# Altium PCB PCB_RB2_My — копия.PcbDoc (part 3 of 3)
Units mm, origin at the board's own origin, x right, y up, seen from the top; angles counter-clockwise.
Board outline 198 x 170 mm, 2 copper layers (Top, Bottom); 107 components, 89 nets, 429 pads, 3906 vias.
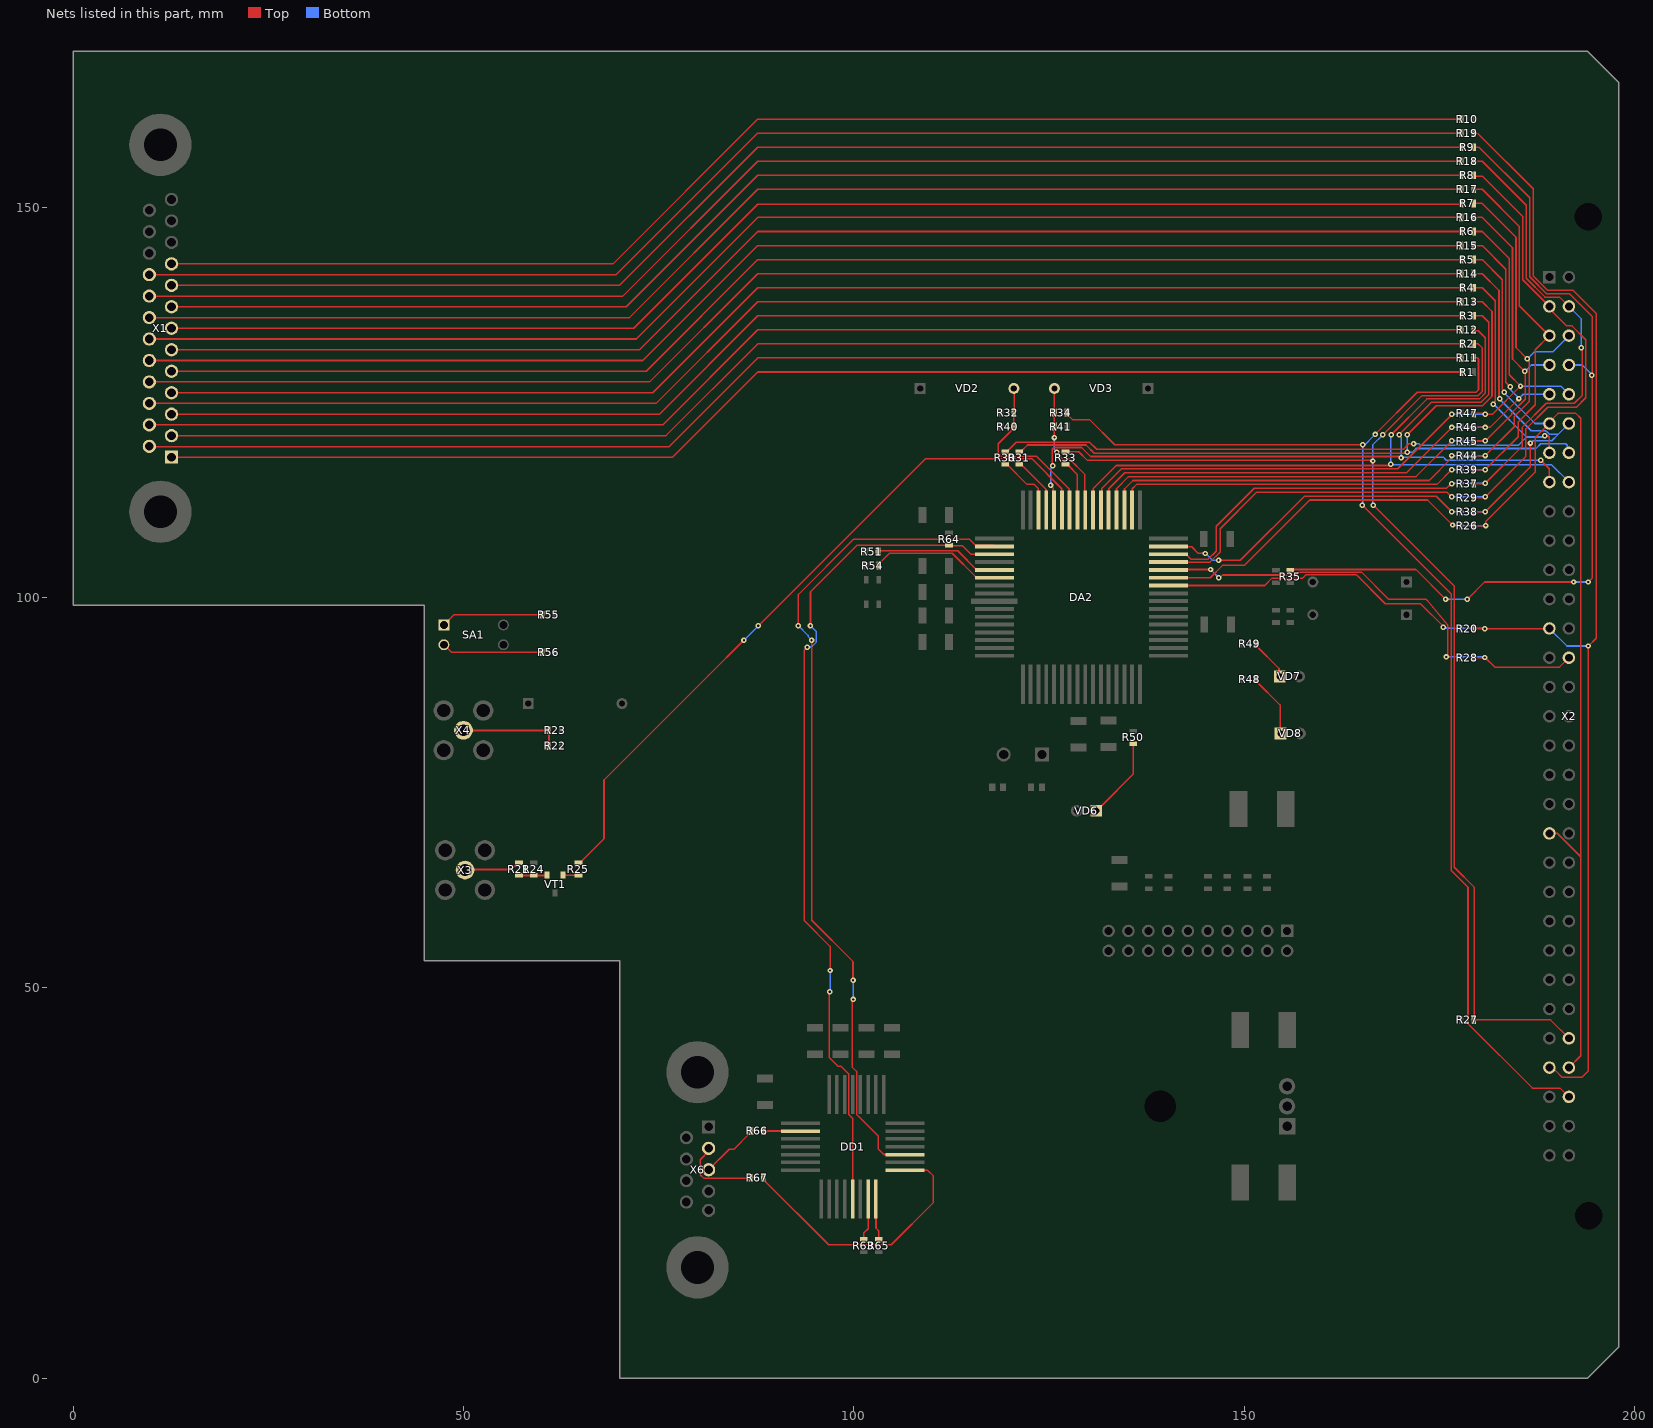
[diagram p3: the nets of this part, all layers, seen from the top]

## Via types
v1: diameter 0.7, hole 0.3, Top to Bottom, tented both sides, 3906 vias

## Nets (pads, with @x,y where several pads share a name; then routed paths per layer and width w, separated by ;. In a path a pad name is that pad's centre, name@x,y a point inside that pad or via, vN(x,y) a via of type N, cw(c..) or ccw(c..) an arc to the next point about the centre after c; other vN are vias at no path point) (continued)
NetDA2_48: DA2.48 R34.2 R41.1 VD3.2 | length 17.2
  Top w0.2: v1(125.7,120.5) R41.1@125.7,121.9 R34.2@125.7,123.7 125.7,126.25 VD3.2@125.725,126.275 ; v1(125.975,118.6) 125.975,118.465 126.665,117.775 127.59,117.775 129.6,115.765 DA2.48@129.6,111.2
  Bottom w0.2: v1(125.7,120.5) 125.7,118.967 125.975,118.692 v1(125.975,118.6)
NetDA2_49: DA2.49 R33.2 | length 6.6
  Top w0.2: R33.2@127.125,117.1 127.325,117.1 127.525,116.9 127.525,116.875 128.65,115.75 DA2.49@128.65,111.2
NetDA2_50: DA2.50 R32.2 R40.1 VD2.2 | length 22
  Top w0.2: R40.1@120.45,122.25 120.5,122.3 R32.2@120.5,123.7 ; R40.1@120.5,121.9 120.5,121.7 120.3,121.5 118.5,119.7 118.5,118.482 118.882,118.1 123.4,118.1 127.617,113.883 127.617,111.283 DA2.50@127.65,111.25 ; R32.2@120.525,123.7 120.525,126.2 VD2.2@120.575,126.25
NetDA2_51: DA2.51 R25.1 | length 92.1
  Top w0.2: R25.1@64.725,66.025 64.925,66.025 68,69.1 68,76.65 81.375,90.025 85.898,94.548 v1(85.925,94.548) ; v1(87.775,96.375) 109.175,117.775 122.825,117.775 126.65,113.95 DA2.51@126.65,111.2
  Bottom w0.2: v1(85.925,94.548) 85.948,94.548 v1(87.775,96.375)
NetDA2_53: DA2.53 R31.2 | length 7.4
  Top w0.2: R31.2@121.2,117.1 121.4,117.1 124.617,113.883 124.617,111.233 DA2.53@124.65,111.2
NetDA2_54: DA2.54 R30.2 | length 8.3
  Top w0.2: R30.2@119.4,117.1 119.6,117.1 122.2,114.5 123.1,114.5 123.65,113.95 DA2.54@123.65,111.2
NetDA2_58: DA2.58 DD1.20 | length 107.5
  Top w0.2: v1(92.9,96.4) 92.9,100.4 100,107.5 114.775,107.5 115.575,106.7 117.85,106.7 DA2.58@118,106.55 ; v1(94.588,94.548) 94.6,94.537 94.6,58.675 99.9,53.375 v1(99.9,50.975) ; v1(99.925,48.525) 99.829,48.429 99.829,48.212 99.775,48.158 99.775,39.875 100.35,39.3 100.35,33.797 100.522,33.625 103.15,30.997 103.15,29.35 103.84,28.66 DD1.20@106.53,28.66
  Bottom w0.2: v1(92.9,96.4) 94.14,95.16 94.14,95.019 94.588,94.57 v1(94.588,94.548) ; v1(99.9,50.975) 99.925,50.95 v1(99.925,48.525)
NetDA2_59: DA2.59 DD1.14 R64.1 | length 108.3
  Top w0.2: v1(94.025,93.625) 93.65,93.25 93.65,58.625 96.957,55.318 v1(96.957,52.232) ; v1(94.45,96.4) 94.45,100.75 100.4,106.7 112.7,106.7 ; v1(96.9,49.532) 96.85,49.482 96.85,41.1 97.987,39.963 98.362,39.963 99.325,39 99.325,33.822 99.84,33.307 DD1.14@99.84,22.97 ; 112.7,106.625 113.95,106.625 115.025,105.55 DA2.59@117.95,105.55
  Bottom w0.2: v1(94.025,93.625) 94.071,93.671 94.571,93.671 95.163,94.263 95.163,95.687 v1(94.45,96.4) ; v1(96.9,49.532) 96.975,49.607 96.975,52.215 v1(96.957,52.232)
NetDA2_61: DA2.61 R51.2 | length 15.8
  Top w0.2: R51.2@103.2,106 113.3,106 115.75,103.55 DA2.61@117.95,103.55
NetDA2_62: DA2.62 R54.1 | length 14.9
  Top w0.2: R54.1@103.2,104.3 103.4,104.5 104.575,105.675 112.6,105.675 115.575,102.7 116.125,102.7 DA2.62@116.275,102.55
NetDD1_5: DD1.5 R66.1 | length 4.7
  Top w0.2: R66.1@88.425,31.675 93.135,31.675 DD1.5@93.15,31.66
NetDD1_16: DD1.16 R63.2 | length 5.4
  Top w0.2: R63.2@101.275,17.8 101.275,18.6 101.84,19.165 DD1.16@101.84,22.97
NetDD1_17: DD1.17 R65.2 | length 5.3
  Top w0.2: DD1.17@102.84,22.97 102.84,19.24 103.2,18.88 R65.2@103.2,17.8
NetDD1_18: DD1.18 R67.1 | length 35.3
  Top w0.2: R67.1@88.525,25.8 R67.1@88.4,25.675 88.4,25.475 96.775,17.1 104.8,17.1 110.2,22.5 110.2,25.9 109.44,26.66 DD1.18@106.53,26.66
NetR1_1: R1.1 X1.1 | length 169.7
  Top w0.2: X1.1@12.6,118 76.8,118 87.7,128.9 R1.1@177.8,128.9
NetR2_1: R2.1 X1.2 | length 170.1
  Top w0.2: X1.2@12.6,120.75 75.95,120.75 87.7,132.5 R2.1@177.8,132.5
NetR3_1: R3.1 X1.3 | length 170.4
  Top w0.2: X1.3@12.6,123.5 75.1,123.5 87.7,136.1 R3.1@177.8,136.1
NetR4_1: R4.1 X1.4 | length 170.8
  Top w0.2: X1.4@12.6,126.25 74.25,126.25 87.7,139.7 R4.1@177.8,139.7
NetR5_1: R5.1 X1.5 | length 171.1
  Top w0.2: X1.5@12.6,129 73.4,129 87.7,143.3 R5.1@177.8,143.3
NetR6_1: R6.1 X1.6 | length 171.5
  Top w0.2: X1.6@12.6,131.75 72.55,131.75 87.7,146.9 R6.1@177.8,146.9
NetR7_1: R7.1 X1.7 | length 171.8
  Top w0.2: X1.7@12.6,134.5 71.8,134.5 87.7,150.4 177.7,150.4 R7.1@177.8,150.5
NetR8_1: R8.1 X1.8 | length 172.2
  Top w0.2: X1.8@12.6,137.25 70.85,137.25 87.7,154.1 R8.1@177.8,154.1
NetR9_1: R9.1 X1.9 | length 172.5
  Top w0.2: X1.9@12.6,140 70,140 87.7,157.7 R9.1@177.8,157.7
NetR10_1: R10.1 X1.10 | length 172.9
  Top w0.2: X1.10@12.6,142.75 69.15,142.75 87.7,161.3 R10.1@177.8,161.3
NetR11_1: R11.1 X1.14 | length 172.8
  Top w0.2: X1.14@9.76,119.375 9.835,119.3 76.3,119.3 87.7,130.7 R11.1@177.8,130.7
NetR12_1: R12.1 X1.15 | length 173.1
  Top w0.2: X1.15@9.76,122.125 75.525,122.125 87.7,134.3 R12.1@177.8,134.3
NetR13_1: R13.1 X1.16 | length 173.4
  Top w0.2: X1.16@9.76,124.875 74.675,124.875 87.7,137.9 R13.1@177.8,137.9
NetR14_1: R14.1 X1.17 | length 173.8
  Top w0.2: X1.17@9.76,127.625 73.825,127.625 87.7,141.5 R14.1@177.8,141.5
NetR15_1: R15.1 X1.18 | length 174.1
  Top w0.2: X1.18@9.76,130.375 72.975,130.375 87.7,145.1 R15.1@177.8,145.1
NetR16_1: R16.1 X1.19 | length 174.5
  Top w0.2: X1.19@9.76,133.125 72.125,133.125 87.7,148.7 R16.1@177.8,148.7
NetR17_1: R17.1 X1.20 | length 174.8
  Top w0.2: X1.20@9.76,135.875 71.275,135.875 87.7,152.3 R17.1@177.8,152.3
NetR18_1: R18.1 X1.21 | length 175.2
  Top w0.2: X1.21@9.76,138.625 70.425,138.625 87.7,155.9 R18.1@177.8,155.9
NetR19_1: R19.1 X1.22 | length 175.5
  Top w0.2: X1.22@9.76,141.375 69.575,141.375 87.7,159.5 R19.1@177.8,159.5
NetR21_1: R21.1 X3.1 | length 7.3
  Top w0.2: X3.1@50.2,65.1 50.275,65.175 56.1,65.175 56.7,65.775 56.7,65.825 56.9,66.025 R21.1@57.1,66.025
NetR21_2: R21.2 R24.2 VT1.3 | length 3.6
  Top w0.254: R21.2@57.1,64.425 58.525,64.425 60.7,64.425 VT1.3@60.725,64.45
NetR22_2: R22.2 R23.1 X4.1 | length 13.4
  Top w0.254: X4.1@50,83 R23.1@60.925,83 ; R22.2@60.925,80.8 R22.2@60.925,81 R23.1@60.925,83 ; R23.1@60.925,83.2 R23.1@60.925,83 ; R23.1@60.95,83 R23.1@60.925,83
NetR25_2: R25.2 VT1.2 | length 2
  Top w0.2: VT1.2@62.725,64.45 64.7,64.45 R25.2@64.725,64.425
NetR48_2: R48.2 VD8.1 | length 8.5
  Top w0.2: R48.2@151.5,89.55 151.5,89.35 154.6,86.25 VD8.1@154.6,82.3
NetR49_2: R49.2 VD7.1 | length 5.6
  Top w0.2: R49.2@151.5,94.1 151.5,93.9 154.467,90.933 VD7.1@154.467,89.7
NetR50_2: R50.2 VD6.1 | length 10.9
  Top w0.2: VD6.1@130.719,72.7 131.369,73.35 131.75,73.35 135.8,77.4 R50.2@135.8,81.3
NetR55_1: R55.1 SA1.1 | length 13.1
  Top w0.2: SA1.1@47.5,96.5 48.8,97.8 R55.1@60.1,97.8
NetR56_1: R56.1 SA1.3 | length 13
  Top w0.2: SA1.3@47.5,93.96 48.46,93 R56.1@60.1,93
NetR66_2: R66.2 X6.3 | length 7.9
  Top w0.2: X6.3@81.3,26.45 X6.3@81.475,26.625 ; X6.3@81.4,26.7 84.05,29.35 84.65,29.35 86.575,31.275 86.625,31.275 86.825,31.475 R66.2@86.825,31.675
NetR67_2: R67.2 X6.2 | length 10.5
  Top w0.2: X6.2@81.4,29.45 81.4,29.075 80.325,28 80.325,26.075 80.8,25.6 86.725,25.6 R67.2@86.8,25.675
"Внеш. зап. 15В": R11.2 R34.1 X2.29B | length 158.8
  Top w0.2: R34.1@127.3,123.7 127.3,123.5 127.5,123.3 128,122.8 130.2,122.8 133.425,119.575 v1(165.2,119.575) ; v1(165.15,111.825) 176.525,100.45 176.525,65.05 178.675,62.9 178.675,45.425 186.925,37.175 190.475,37.175 X2.29B@191.6,36.05 ; v1(166.775,120.9) 172.175,126.3 179.7,126.3 180.025,126.625 180.025,130.575 179.9,130.7 R11.2@179.4,130.7
  Bottom w0.2: v1(165.15,111.825) 165.2,111.875 v1@165.2,119.4 ; v1(165.2,119.575) v1@165.2,119.4 ; v1(166.775,120.9) 165.275,119.4 v1@165.2,119.4
"Внеш. зап. лог. 1": DA2.34 R19.2 R20.1 X2.13A X2.28A | length 194.9
  Top w0.2: DA2.34@140.3,101.55 152.632,101.55 153.582,102.5 157.5,102.5 157.95,102.95 164.35,102.95 168.074,99.226 172.599,99.226 175.525,96.3 v1(175.525,96.2) ; R20.1@179.3,96 R20.1@179.4,96 189.05,96 X2.13A@189.1,96.05 ; R19.2@179.4,159.5 179.5,159.4 180,159.4 187.025,152.375 187.025,141.207 188.832,139.4 192.1,139.4 195.1,136.4 195.1,94.8 v1(194.1,93.8) 194.1,39.4 193.275,38.575 190.725,38.575 189.878,39.422 189.857,39.422 189.479,39.8 X2.28A@189.1,39.8 ; v1(180.843,96.028) v1@180.845,96.031
  Bottom w0.2: v1(175.525,96.2) 175.621,96.104 176.263,96.104 176.267,96.1 180.772,96.1 v1(180.843,96.028) ; X2.13A@189.05,96 X2.13A@189.1,96.05 191.35,93.8 v1(194.1,93.8)
"Имп. 0": DA2.37 R8.2 R29.1 X2.2A | length 103.4
  Top w0.2: DA2.37@140.3,104.55 145.625,104.55 146.925,105.85 146.925,108.825 151.6,113.5 176,113.5 v1(176.6,112.9) ; R29.1@179.4,112.8 180.615,112.8 180.619,112.804 180.804,112.804 v1(180.9,112.9) 186.1,118.1 186.1,121.6 188.9,124.4 192.56,124.4 193.775,125.615 193.775,133.025 192,134.8 191.325,134.8 189.1,137.025 X2.2A@189.1,137.3 188.825,137.575 185.675,140.725 185.675,148.825 180.5,154 R8.2@179.4,154
  Bottom w0.2: v1(176.6,112.9) v1(180.9,112.9)
"Имп. 1": DA2.38 R18.2 R37.1 X2.2B | length 104.3
  Top w0.2: DA2.38@140.3,105.55 142.55,105.55 143.2,104.9 145.375,104.9 146.425,105.95 146.425,109.125 151.3,114 175.931,114 176.402,114.471 v1@176.529,114.471 ; R18.2@179.3,155.9 180.5,155.9 186.125,150.275 186.125,140.9 188.525,138.5 190.4,138.5 X2.2B@191.6,137.3 ; R37.1@179.4,114.6 180.85,114.6 v1(180.9,114.65) 185.6,119.35 185.6,121.8 188.7,124.9 192.3,124.9 193.3,125.9 193.3,131.633 193.296,131.637 193.296,131.904 v1(193.2,132)
  Bottom w0.2: v1(176.6,114.6) 176.65,114.65 v1(180.9,114.65) ; X2.2B@191.6,137.3 193.2,135.7 v1(193.2,132)
"Имп. 1 ПРД 1к": R4.2 R30.1 X2.7A | length 96.3
  Top w0.2: R30.1@119.4,118.7 119.6,118.7 120.8,119.9 130.2,119.9 131.041,119.059 131.1,119 170.4,119 171.1,119.7 v1(171.7,119.7) ; R4.2@179.4,139.7 180.5,139.7 182.175,138.025 182.175,125.16 181.925,124.91 v1(181.925,124.775) ; v1(188.507,120.73) 188.533,120.704 188.942,120.704 189.1,120.546 X2.7A@189.1,118.55
  Bottom w0.2: v1(171.7,119.7) 171.71,119.69 172.41,119.69 172.6,119.5 185.1,119.5 186.175,120.575 ; v1(181.925,124.775) 181.975,124.775 186.175,120.575 ; v1(188.507,120.73) 188.372,120.73 188.217,120.575 186.175,120.575
"Имп. 1 ПРД 2к": R13.2 R31.1 X2.7B | length 101.7
  Top w0.2: R31.1@121.2,118.7 121.4,118.7 122.25,119.55 129.75,119.55 130.8,118.5 163.491,118.5 170.533,118.5 170.537,118.504 170.804,118.504 v1(170.9,118.6) ; v1(170.9,120.875) 174.6,124.575 180.535,124.575 181.75,125.79 181.75,136.65 180.5,137.9 R13.2@179.4,137.9 ; X2.7B@191.6,118.3 X2.7B@191.6,118.55
  Bottom w0.2: v1(170.9,120.875) v1(170.9,118.6) 171.5,118.6 172,119.1 187.383,119.1 187.983,119.7 191.2,119.7 191.397,119.503 191.397,118.753 X2.7B@191.6,118.55
"Имп. 2": DA2.42 R17.2 R39.1 X2.3A | length 94.5
  Top w0.2: DA2.42@135.65,111.2 135.675,111.225 135.675,113.95 136.225,114.5 174.7,114.5 v1(176.6,116.4) ; R17.2@179.3,152.3 180.5,152.3 185.25,147.55 185.25,137.4 X2.3A@189.1,133.55 ; R39.1@179.4,116.4 v1(180.9,116.4) 185.1,120.6 185.1,122.5 187.3,124.7 187.3,131.75 X2.3A@189.05,133.5
  Bottom w0.2: v1(176.6,116.4) v1(180.9,116.4)
"Имп. 3": DA2.43 R7.2 R44.1 X2.3B | length 97.2
  Top w0.2: DA2.43@134.65,111.2 134.675,111.225 134.675,113.925 135.75,115 173.7,115 176.504,117.804 176.504,118.104 v1(176.6,118.2) ; R7.2@179.3,150.5 180.5,150.5 184.825,146.175 184.825,132.025 v1(186.25,130.6) ; R44.1@179.4,118.2 v1(180.9,118.2) 184.6,121.9 184.6,123.2 186.5,125.1 v1@186.5,130.7
  Bottom w0.2: v1(176.6,118.2) v1@180.8,118.2 ; v1(186.25,130.6) 186.3,130.6 187.2,131.5 189.55,131.5 191.568,133.518 X2.3B@191.6,133.55
"Имп. 3МГц": DA2.35 R5.2 R26.1 X2.6A X2.20A X2.28B | length 185
  Top w0.2: DA2.35@140.3,102.55 145.65,102.55 147.225,104.125 150.025,104.125 158.4,112.5 173.5,112.5 v1(176.7,109.3) ; R5.2@179.3,143.3 180.5,143.3 183.075,140.725 183.075,126.685 183.325,126.435 v1(183.325,126.3) ; R26.1@179.4,109.2 v1@181,109.2 ; v1(180.943,109.228) 180.945,109.231 180.945,109.745 187.3,116.1 187.3,120.5 X2.6A@189.1,122.3 189.1,122.5 190.2,123.6 192.5,123.6 193.125,122.975 193.125,66.8 ; X2.20A@189.1,69.8 190.125,69.8 193.125,66.8 ; X2.28B@191.6,39.8 193.125,41.325 193.125,66.8
  Bottom w0.2: v1(176.7,109.3) 176.772,109.228 v1(180.943,109.228) ; v1(183.325,126.3) 183.325,126.225 187.25,122.3 X2.6A@189.1,122.3
"Имп. 3МГц инв.": DA2.36 R28.1 X2.14B | length 62.2
  Top w0.2: DA2.36@140.3,103.55 142.8,103.55 142.85,103.6 v1(145.7,103.6) ; v1(146.745,102.543) 146.88,102.543 147.237,102.9 156.618,102.9 156.993,103.275 165.026,103.275 168.5,99.801 173.299,99.801 173.416,99.684 176.054,96.524 176.1,96.468 176.1,92.76 175.875,92.535 v1(175.875,92.4) ; R28.1@179.3,92.3 R28.1@179.4,92.3 ; R28.1@179.4,92.1 R28.1@179.4,92.3 ; v1(180.843,92.328) v1@180.845,92.331 ; X2.14B@191.6,92.3 190.4,91.1 182.1,91.1 180.9,92.3 R28.1@179.4,92.3
  Bottom w0.2: v1(145.7,103.6) 146.745,102.555 v1(146.745,102.543) ; v1(175.875,92.4) 180.772,92.4 v1(180.843,92.328)
"Имп. 4": DA2.44 R16.2 R45.1 X2.4A | length 91.8
  Top w0.2: DA2.44@133.65,111.2 133.65,113.95 135.2,115.5 172.025,115.5 v1(176.6,120.075) ; R16.2@179.3,148.7 R16.2@179.4,148.7 180.5,148.7 184.375,144.825 184.375,130.55 v1(185.925,129) ; R45.1@179.4,120 179.475,120.075 v1(180.9,120.075) 184.3,123.475 184.3,123.7 186,125.4 v1@186,129
  Bottom w0.2: v1(176.6,120.075) v1(180.9,120.075) ; v1(185.925,129) 186,129 186.8,129.8 X2.4A@189.1,129.8
"Имп. 5": DA2.45 R15.2 R46.1 X2.5A | length 88.5
  Top w0.2: DA2.45@132.65,111.2 132.65,113.95 134.7,116 170.8,116 v1(176.6,121.8) ; R15.2@179.3,145.1 180.5,145.1 183.525,142.075 183.525,127.575 v1(184.1,127) ; R46.1@179.4,121.8 v1(180.9,121.8) 181.5,121.8 v1(185.2,125.5)
  Bottom w0.2: v1(176.6,121.8) v1(180.9,121.8) ; v1(184.1,127) 184.185,126.915 184.185,126.565 185.2,125.55 v1(185.2,125.5) 185.75,126.05 X2.5A@189.1,126.05
"Имп. 6": DA2.46 R6.2 R47.1 X2.5B | length 93.2
  Top w0.2: DA2.46@131.65,111.2 131.762,111.312 131.762,113.962 134.3,116.5 169.69,116.5 176.6,123.41 v1(176.6,123.5) ; R6.2@179.3,146.9 180.5,146.9 183.95,143.45 183.95,128.55 v1(185.4,127.1) 181.8,123.5 v1(180.9,123.5) 180.765,123.5 180.665,123.6 R47.1@179.4,123.6
  Bottom w0.2: v1(176.6,123.5) 176.632,123.468 180.868,123.468 v1(180.9,123.5) ; v1(185.4,127.1) 190.55,127.1 X2.5B@191.6,126.05
"Имп. ПЗ АПД": DA2.39 R14.2 R38.1 X2.6B | length 91.7
  Top w0.2: DA2.39@140.3,106.55 140.35,106.5 143.3,106.5 144.103,105.697 144.953,105.697 v1(145,105.65) ; v1(146.725,104.775) 149.5,104.775 157.725,113 174.6,113 v1(176.6,111) ; R38.1@179.4,111 v1(180.9,111) 186.675,116.775 v1(186.675,119.8) ; R14.2@179.4,141.5 180.5,141.5 182.65,139.35 182.65,125.842 182.654,125.838 182.654,125.571 v1(182.75,125.475)
  Bottom w0.2: v1(145,105.65) 145.075,105.65 145.95,104.775 v1(146.725,104.775) ; v1(176.6,111) v1(180.9,111) ; v1(182.75,125.475) 182.75,125.4 186.787,121.363 188.602,121.363 188.69,121.275 188.775,121.275 189.15,120.9 190.2,120.9 ; v1(186.675,119.8) 186.742,119.8 187.042,120.1 189.4,120.1 190.2,120.9 ; X2.6B@191.6,122.3 190.2,120.9
Лог.1: R2.2 R27.1 R33.1 X2.27B | length 155.7
  Top w0.2: R33.1@127.125,118.7 128.8,118.7 129.925,117.575 166.425,117.575 v1(166.5,117.5) ; v1(166.525,111.85) 176.9,101.475 176.9,65.475 179.5,62.875 R27.1@179.5,46 ; v1(167.775,120.875) 167.788,120.875 172.788,125.875 179.975,125.875 180.475,126.375 180.475,132.025 180,132.5 R2.2@179.4,132.5 ; R27.1@179.4,45.9 189.25,45.9 X2.27B@191.6,43.55
  Bottom w0.2: v1(166.525,111.85) 166.5,111.875 v1(166.5,117.5) 166.5,119.6 v1(167.775,120.875)
"Призн. 1мкс": DA2.52 R3.2 X2.8A | length 103.3
  Top w0.2: v1(125.2,114.4) 125.205,114.4 125.572,114.033 125.572,111.278 DA2.52@125.65,111.2 ; v1(125.5,116.9) 125.411,116.989 125.411,118.056 125.4,118.067 125.4,119 125.625,119.225 129.175,119.225 130.325,118.075 169.815,118.075 169.965,117.925 v1(170.1,117.925) ; v1(169.85,120.875) 173.975,125 180.3,125 181.325,126.025 181.325,135.275 180.5,136.1 R3.2@179.4,136.1 ; v1(188,117.6) 189.1,116.5 X2.8A@189.1,114.8 X2.8A@188.9,114.6
  Bottom w0.2: v1(125.2,114.4) 125.2,116.533 125.5,116.833 v1(125.5,116.9) ; v1(169.85,120.875) 169.85,120.758 170.1,120.508 v1(170.1,117.925) 170.175,118 175.5,118 175.9,117.6 v1(188,117.6)
"Призн. 2мкс": DA2.47 R12.2 X2.8B | length 93
  Top w0.2: DA2.47@130.65,111.2 130.65,113.95 133.625,116.925 168.49,116.925 168.665,117.1 v1(168.8,117.1) ; v1(168.85,120.875) 173.425,125.45 180.15,125.45 180.9,126.2 180.9,133.3 180,134.2 179.5,134.2 R12.2@179.4,134.3
  Bottom w0.2: v1(168.85,120.875) 168.8,120.825 v1(168.8,117.1) 168.875,117.025 189.375,117.025 X2.8B@191.6,114.8
Режим: R9.2 R35.1 X2.4B | length 108.7
  Top w0.2: R35.1@155.9,103.5 156,103.6 172,103.6 v1(175.8,99.8) ; v1(178.6,99.8) 180.8,102 v1(192.2,102) ; R9.2@179.3,157.7 180.1,157.7 186.575,151.225 186.575,141.1 188.775,138.9 191.7,138.9 194.6,136 v1@194.6,128.5 ; v1(194.1,102) 194.6,102.5 194.6,128.425 v1(194.525,128.5)
  Bottom w0.2: v1(175.8,99.8) v1(178.6,99.8) ; X2.4B@191.6,129.8 193.3,129.8 194.525,128.575 v1(194.525,128.5) ; v1(192.2,102) v1(194.1,102)
pads on no net: DA1.4 DA2.1 DA2.2 DA2.6 DA2.7 DA2.8 DA2.9 DA2.13 DA2.17 DA2.18 DA2.32 DA2.55 DA2.60 DD1.6 DD1.7 DD1.8 DD1.9 DD1.10 DD1.11 DD1.12 DD1.13 DD1.19 DD1.21 DD1.22 DD1.23 DD1.24 DD1.29 DD1.30 X1.11 X1.12 X1.13 X1.25 X1.26 X1.27 X2.1 X2.1A X2.2 X2.9A X2.9B X2.10A X2.10B X2.11A X2.11B X2.12A X2.12B X2.13B X2.14A X2.15A X2.15B X2.16A X2.16B X2.17A X2.17B X2.18A X2.18B X2.19A X2.19B X2.20B X2.21A X2.21B X2.22A X2.22B X2.23A X2.23B X2.25A X2.25B X2.26A X2.26B X2.27A X2.29A X2.31A X3.3 X3.4 X3.5 X4.3 X4.4 X4.5 X5.11 X5.17 X5.19 X6.1 X6.4 X6.6 X6.7 X6.8 X6.9 X6.10 X6.11

## Polygon pours and split planes (outlines as drawn)
GND on Bottom "Bottom Layer-GND" (solid, remove dead copper, pour order 2): 0,0 0,170 198,170 198,0
GND on Top "Top Layer-GND" (solid, remove dead copper, pour order 0): 0,170 198,170 198,-1 1,-1 0,0

## Other copper
Top:
  pour cut-out: 178.9,162 178.9,128.2 187.5,128.2 187.6,128.3 187.194,128.706 187.194,153.673
  pour cut-out: 136.5,83.1 136.5,82.4 136.8,82.4 136.8,83.1
  pour cut-out: 150.142,103.842 150.145,103.84 150.145,103.1 146.8,103.1 146.3,103.6 146.5,103.8
  pour cut-out: 177.26,161.606 87.7,161.606 87.7,128.842 87.942,128.6 177.5,128.6
  pour cut-out: 135.642,66.658 136.758,66.658 136.8,66.7 137.951,65.549 137.951,64.825 137.508,64.825 137.404,64.928
  pour cut-out: 177.188,68.011 177.206,67.993 178.021,67.993 192.5,52.9 191.288,53.012 177.325,66.975 177.206,66.975
  pour cut-out: 120.1,128.6 126.7,128.6 126.717,128.583 126.717,128.183 120.083,128.183
  pour cut-out: 85.794,95.151 93.994,99.959 101.425,110.076
  pour cut-out: 111.5,96.475 112.75,96.475 112.75,95.95 112.325,95.525 111.5,95.525
  pour cut-out: 109.5,102.025 109.5,99.506 110.4,99.625 115.275,100.825 115.275,101.3 113.104,103.471
  pour cut-out: 108.625,105.375 109.525,105.375 111.425,105.4 111.5,105.4 111.5,103.292 110.808,102.6 108.05,102.6
  pour cut-out: 112.9,99.475 111.5,99.475 111.5,98.925 112.9,98.925
  pour cut-out: 137.3,107.125 137.625,107.125 137.825,106.925 137.825,97.05 137.2,97.05
  pour cut-out: 101.43,25.67 102.6,25.67 102.6,20.275 101.405,20.275
  pour cut-out: 95.438,25.687 95.455,25.67 100.25,25.67 100.25,20.275 95.412,20.275
  pour cut-out: 95.85,26.235 90.45,26.235 90.45,33.085 95.846,33.085 95.863,33.102
  pour cut-out: 102.041,33.098 109.225,32.9 109.23,32.895 109.23,26.986 103.929,26.986 103.83,27.085 103.83,28.506
  pour cut-out: 104.265,39.05 104.265,34.25 104.418,34.25 104.5,38.407 104.5,39.05
  pour cut-out: 103.265,39.05 103.265,33.809 103.409,33.809 103.425,34.625 103.425,35.475 103.425,39.05
  pour cut-out: 102.6,105.2 103.488,105.2 103.525,105.125 103.54,105.073 103.267,104.8 102.7,104.8
  pour cut-out: 121.2,108.5 121.175,108.475 121.175,108 137.1,108 137.1,108.5
  pour cut-out: 56.056,96.248 55.472,94.868 58.7,95.675 59.38,96.355
  pour cut-out: 122.025,113.9 122.025,114.525 122.925,114.525 123.55,113.9
  pour cut-out: 121.2,91.6 121.2,91.942 121.205,91.947 126.04,91.947 126.04,91.653 125.988,91.6
  pour cut-out: 123.5,86.2 124.4,86.2 124.5,86.1 124.5,83.7 123.4,83.7
  pour cut-out: 176.953,65.825 177.2,66 177.5,66 180.4,63.1 180.2,63 179.8,62.9 177.547,65.153
  pour cut-out: 133.1,86.702 133.1,85.011 133.354,84.757 134.458,84.757
  pour cut-out: 173.416,100.084 174.416,101.084 176.3,99.2 176.3,96.712
  pour cut-out: 120,123 120.002,123.002 120.201,123.002 120.201,122.626 120.174,122.6 120,122.6
  pour cut-out: 130.317,123.083 130.433,123.083 130.716,123.366 134.124,119.957 134.124,119.826 133.509,119.826 133.497,119.837
  pour cut-out: 101.265,39 101.265,33.65 101.415,33.65 101.415,39
  pour cut-out: 100.25,41.95 103.2,39 101.1,39 101,39.1 101.5,39.6 101.1,39.2 101,39.1
  pour cut-out: 102.385,34.56 102.326,34.501 102.288,34.501
  pour cut-out: 102.265,39.05 102.271,39.044 102.271,38.883 102.412,39.024 102.412,34.56 102.357,34.56 102.271,34.474
  pour cut-out: 172.117,103.883 175.723,100.277 176.086,100.277 176.086,100.456 172.423,104.119

## Silkscreen, mask and mechanical layers (free items; w line width, h text height)
Bottom Overlay:
  text "GND" at 186.943,140.755 h1
  text "Имп. 0" at 183,137.005 h1
  text "Имп. 1" at 187,137.005 h1
  text "Имп. 2" at 183,133.005 h1
  text "Имп. 3" at 187,133.005 h1
  text "Имп. 4" at 183,130.005 h1
  text "Режим" at 187,130 h1
  text "Имп. 5" at 183,126.005 h1
  text "Имп. 6" at 187,126.005 h1
  text "Имп. ПЗ АПД" at 187,122.062 h1
  text "Имп. 3МГц" at 181,122.056 h1
  text "Имп. 1 ПРД 2к" at 187,118.062 h1
  text "Имп. 1 ПРД 1к" at 180.964,118.043 h1
  text "Призн. 1мкс" at 181,114.187 h1
  text "Призн. 2мкс" at 187,114.187 h1
  text "Внеш. зап. лог. 1" at 182.5,96 h1
  text "Имп. 3МГц. инв." at 187,92.056 h1
  text "Имп. 3МГц" at 182.5,69.556 h1
  text "+27В вкл. 2мкс" at 182.455,54.826 h1
  text "+27В 2мкс" at 187.478,54.774 h1
  text "Лог.1" at 187.502,43.439 h1
  text "Имп. 3МГц" at 187.478,39.518 h1
  text "Внеш. зап. лог. 1" at 182,39.5 h1
  text "Внеш. зап. 15В" at 187.581,35.786 h1
  text "+5В" at 184.177,32.124 h1
  text "+5В" at 187.233,32.121 h1
  text "GND" at 187.232,28.067 h1